# Altium PCB PCB1.PcbDoc
Units mm, origin at the board's own origin, x right, y up, seen from the top; angles counter-clockwise.
Board outline 152.4 x 101.6 mm, 2 copper layers (Top Layer, Bottom Layer); 37 components, 29 nets, 166 pads, 1 vias.
Unrouted connection lines stored in the file: 87.
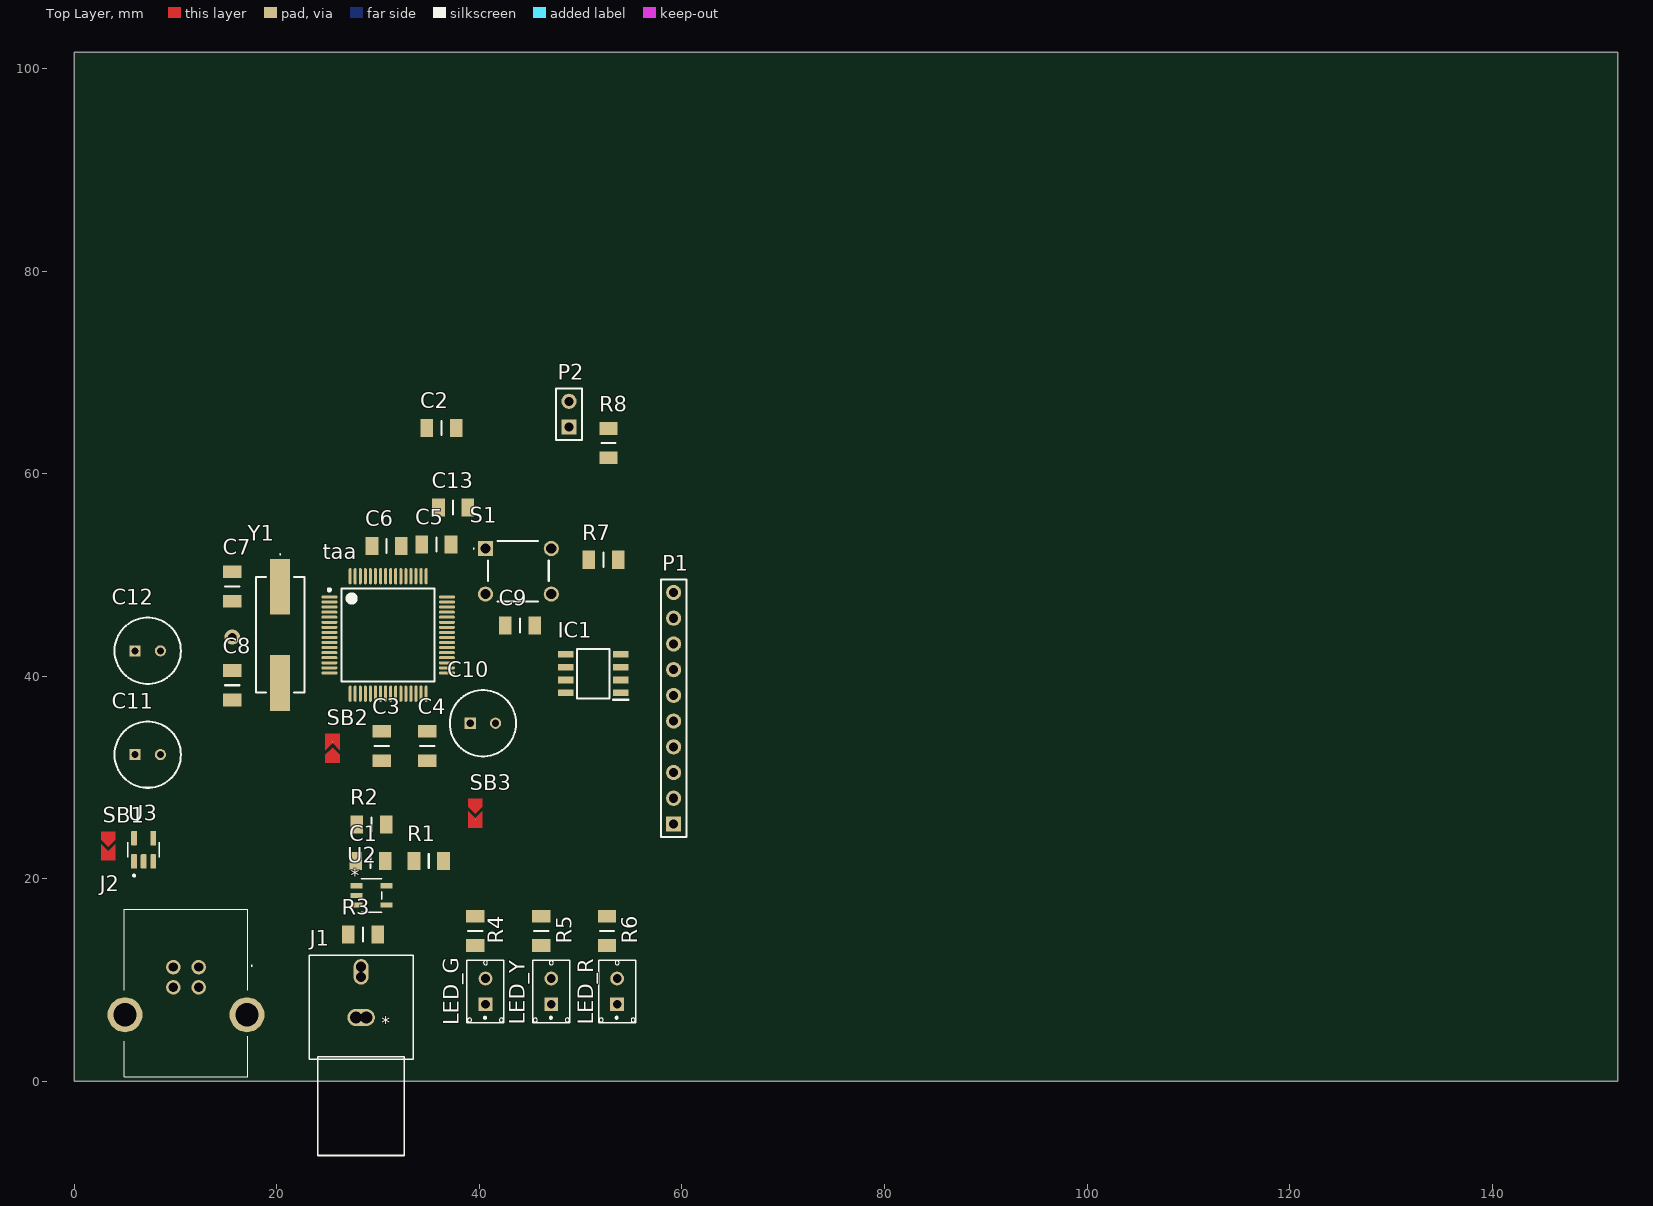
[diagram p0: Top Layer view]
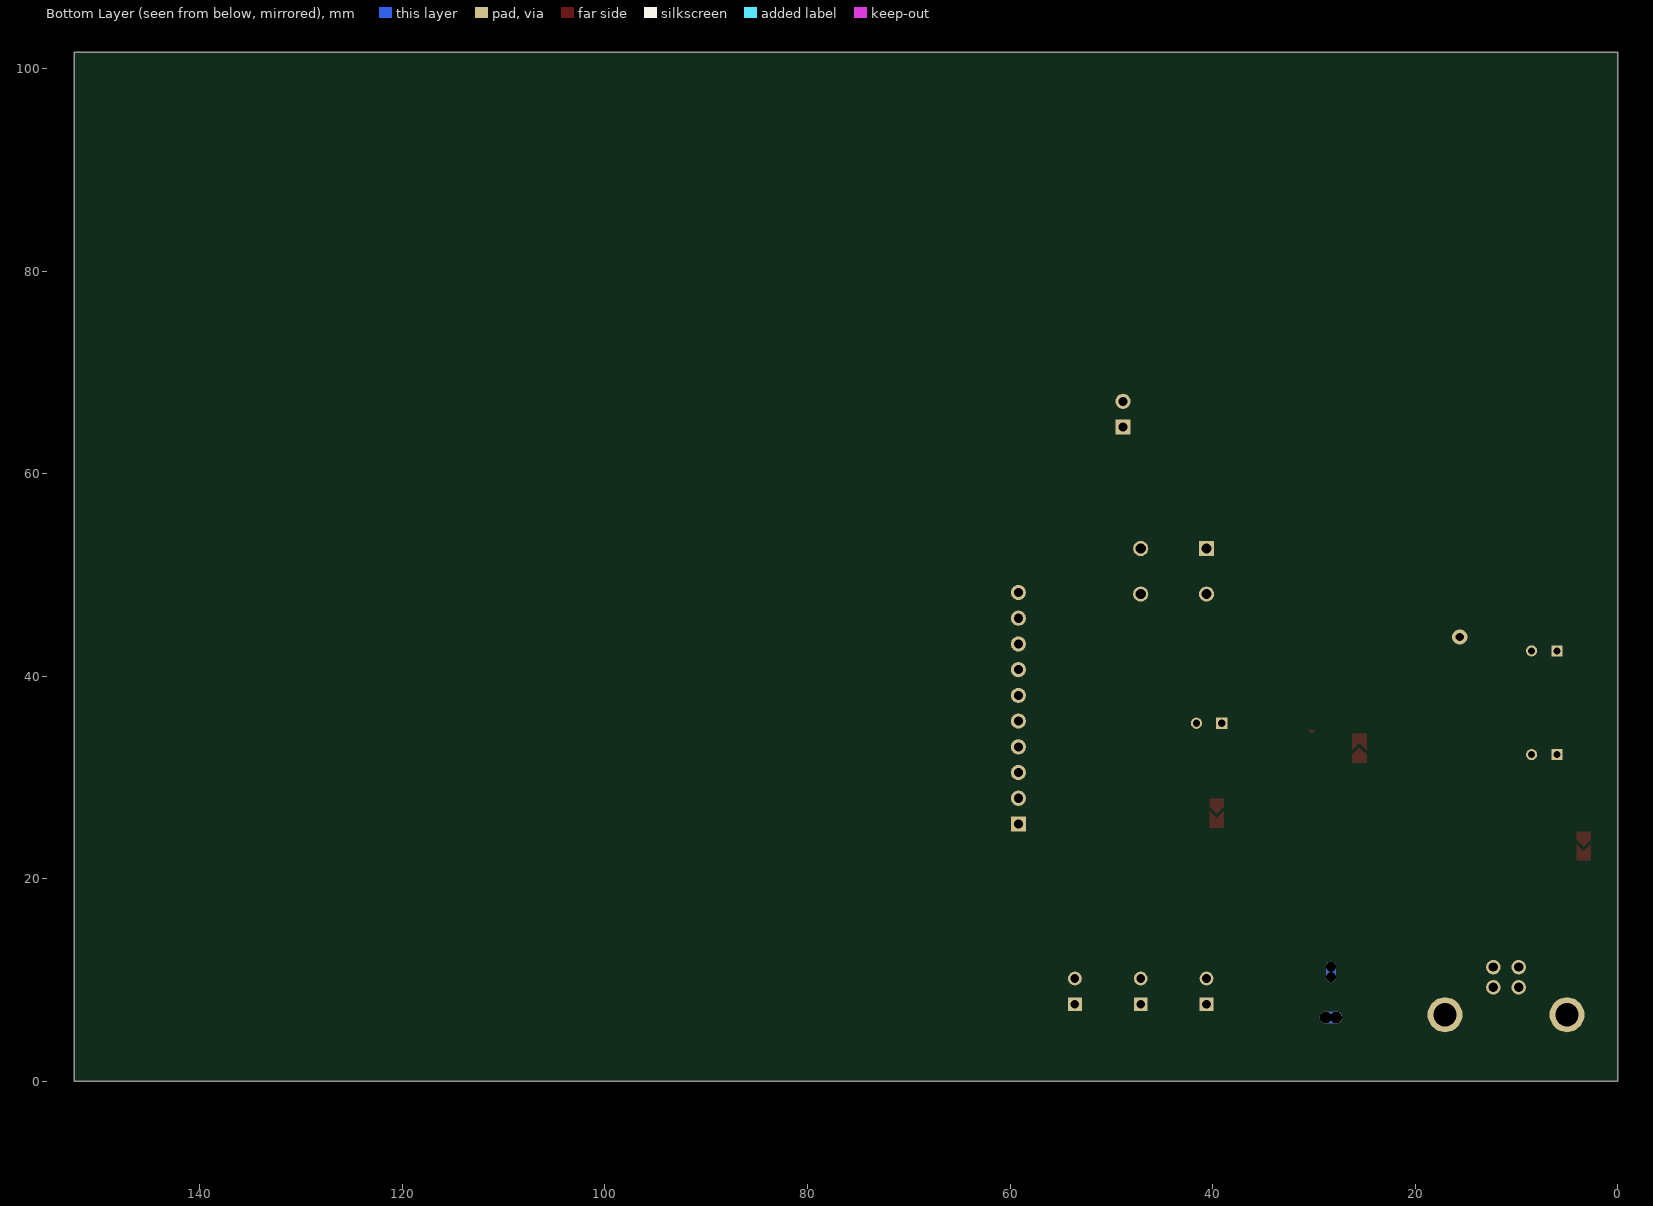
[diagram p1: Bottom Layer view, seen from below]

## Layer stack, top to bottom
Top Solder: solder mask 0.0102, Solder Resist, Dk 3.5
Top Layer: signal copper 0.0356
Dielectric 1: dielectric 0.32, FR-4, Dk 4.8
Bottom Layer: signal copper 0.0356
Bottom Solder: solder mask 0.0102, Solder Resist, Dk 3.5

## Board outline
0,0 152.4,0 152.4,101.6 0,101.6

## Design rules (kind name [scope] priority, off if disabled: settings)
BoardOutlineClearance [All] p1: gap=0.2 ignorepadtopadclearanceinfootprint=FALSE
Clearance [All] p1: gap=0.127 ignorepadtopadclearanceinfootprint=FALSE except(0.25: Arc-Hole Track-Hole SMDPad-Hole THPad-Hole Via-Hole Fill-Hole Poly-Hole Region-Hole Text-Hole)
ComponentClearance [All] p1: gap=0.127 collisioncheckmode=3 verticalgap=0.127 showdistances=TRUE
DiffPairsRouting [All] p1: maxlimit=0.254 minlimit=0.127 mostfreqgap=0.127 toplayer_minwidth=0.127 toplayer_maxwidth=25.4 toplayer_prefwidth=0.127 bottomlayer_minwidth=0.127 bottomlayer_maxwidth=25.4 bottomlayer_prefwidth=0.127 maxuncoupledlength=12.7
Height [All] p1: minheight=0 maxheight=1816.048 prefheight=12.7
HoleSize [All] p1: absolutevalues=TRUE maxlimit=6.3 minlimit=0.3 maxpercent=80.000 minpercent=20.000
HoleToHoleClearance [All] p1: gap=0.25 allowstackedmicrovias=FALSE
MinimumAnnularRing [All] p1: minimumring=0.076
MinimumSolderMaskSliver [All] p1: minsoldermaskwidth=0
PlaneClearance [All] p1: clearance=0.127
PlaneConnect PlaneConnectPowerPads [InPadClass('PowerPads')] p1: planeconnectstyle=Direct reliefexpansion=0.508 reliefentries=4 reliefconductorwidth=0.254 reliefairgap=0.254
PlaneConnect [All] p2: pad.planeconnectstyle=Relief pad.reliefexpansion=0.3 pad.reliefentries=4 pad.reliefconductorwidth=0.127 pad.reliefairgap=0.127 via.planeconnectstyle=Direct via.reliefexpansion=0.3 via.reliefentries=4 via.reliefconductorwidth=0.127 via.reliefairgap=0.127
PolygonConnect PolygonConnectPowerPads [All vs (InPadClass('PowerPads'))] p1: connectstyle=Direct reliefconductorwidth=0.254 reliefentries=4 polygonreliefangle="90 Angle" airgapwidth=0.254
PolygonConnect [All] p2: thpad.connectstyle=Relief thpad.reliefconductorwidth=0.127 thpad.reliefentries=4 thpad.polygonreliefangle="90 Angle" thpad.airgapwidth=0.127 smdpad.connectstyle=Relief smdpad.reliefconductorwidth=0.127 smdpad.reliefentries=4 smdpad.polygonreliefangle="90 Angle" smdpad.airgapwidth=0.127 via.connectstyle=Direct via.reliefconductorwidth=0.127 via.reliefentries=4 via.polygonreliefangle="90 Angle" via.airgapwidth=0.127
RoutingVias [All] p1: holewidth=0.3 width=0.6 viastyle="Through Hole" minholewidth=0.3 minwidth=0.6 maxholewidth=0.6 maxwidth=6.6
SilkToSilkClearance [All] p1: silktosilkclearance=0
SilkToSolderMaskClearance [IsPad] p1: minsilkscreentomaskgap=0.127 clearancetoexposedcopper=TRUE
SolderMaskExpansion [All] p1: expansion=0.075 istentingtop=FALSE
Width [All] p1: maxlimit=25.4 minlimit=0.127 preferedwidth=0.127 minimp=50.000000 maximp=50.000000 favimp=50.000000
20 further rules are at their usual default settings.

## Components (designator, comment, footprint, x,y, rotation, side; value= is the part's Value field where it differs from the comment)
C1 "Cap" RESC3216X70N 29.25,21.75 r0 top value="4.7 nF"
C2 "Cap" RESC3216X70N 36.25,64.5 r0 top value="100 nF"
C3 "Cap" RESC3216X70N 30.35,33.1 r90 top value="100 nF"
C4 "Cap" RESC3216X70N 34.85,33.1 r90 top value="100 nF"
C5 "Cap" RESC3216X70N 35.75,53 r0 top value="100 nF"
C6 "Cap" RESC3216X70N 30.85,52.85 r0 top value="100 nF"
C7 "Cap" RESC3216X70N 15.6,48.85 r270 top value="18 pF"
C8 "Cap" RESC3216X70N 15.6,39.1 r90 top value="18 pF"
C9 "Cap" RESC3216X70N 44,45 r180 top value="100 nF"
C10 "Cap" CAPPRD250W50D655H1250 39.1,35.35 r0 top value="4.7 uF"
C11 "Cap" CAPPRD250W50D655H1250 6,32.25 r0 top value=1uF
C12 "Cap" CAPPRD250W50D655H1250 6,42.5 r0 top value=1uF
C13 "Cap" RESC3216X70N 37.405,56.642 r0 top value="100 nF"
IC1 "NLSX4373DR2G" SOIC127P600X175-8N 51.25,40.25 r180 top
J1 "RCA" KLPX-0848A-2-B_KYC 28.321,6.295 r180 top
J2 "USB B Fem" UJ2BH1TH 11.029,0.461 r0 top
LED_G "fucking led maat hoe moeilijk ist kutprogram" LED_SSL-LX4673GD-LA20 40.6,8.87 r90 top
LED_R "fucking led maat hoe moeilijk ist kutprogram" LED_SSL-LX4673GD-LA20 53.6,8.87 r90 top
LED_Y "fucking led maat hoe moeilijk ist kutprogram" LED_SSL-LX4673GD-LA20 47.1,8.87 r90 top
P1 "Header 10" HDR1X10 59.182,25.4 r90 top
P2 "HDR_CLR_BTN" HDR1X2 48.848,64.597 r90 top
R1 "Res1" RESC3216X70N 35,21.75 r0 top value=100K
R2 "Res1" RESC3216X70N 29.35,25.35 r0 top value=220
R3 "Res1" RESC3216X70N 28.5,14.5 r0 top value=75
R4 "Res1" RESC3216X70N 39.6,14.85 r90 top value=150
R5 "Res1" RESC3216X70N 46.1,14.85 r90 top value=150
R6 "Res1" RESC3216X70N 52.6,14.85 r90 top value=150
R7 "Res1" RESC3216X70N 52.25,51.5 r0 top value=4k7
R8 "Res1" RESC3216X70N 52.75,63 r90 top value=4k7
S1 "Doubl-Pole, Single-Throw Button" TS026655BK160LCRD 40.6,52.6 r0 top
SB1 "Solder Bridge" "Solder Bridge" 5.35,19.85 r270 top
SB2 "Solder Bridge" "Solder Bridge" 23.5,36.25 r90 top
SB3 "Solder Bridge" "Solder Bridge" 41.6,23.1 r270 top
taa "STM32F446RCT6" STM-LQFP64_L 30.988,44.069 r0 top
U2 "Inverter1" DBV5-M 29.35,18.35 r0 top
U3 "NCP115ASN330T2G" SOT95P275X120-5N 6.85,22.85 r90 top
Y1 "XTAL" ECS80185PXGMTR 20.32,44.069 r270 top

## Footprints (in the part's own frame and the unit in brackets; to place one, negate y for a bottom-side part, rotate by r counter-clockwise, add the part's x,y. Pads: shape width x height; smd on the part's side, far side on the other; paste and mask are expansions set on the pad)
CAPPRD250W50D655H1250 [mm]
  rect 1.1x1.1 hole 0.7: 1(0,0)
  round 1.1 hole 0.7: 2(2.5,0)
  silkscreen extent -2.02,-3.27 4.52,3.27, body extent -2.14,-3.4 4.65,3.4, height 12.5
DBV5-M [mil]
  rect 46.5x20 smd paste+0 mask+0: 1(-57.75,37.4) 2(-57.75,0) 3(-57.75,-37.4) 4(57.75,-37.4) 5(57.75,37.4)
  silkscreen extent -40,-65 40,65, body extent -59,-60 59,60, height 57
ECS80185PXGMTR [mm]
  rect 5.5x2 smd: 1(-4.75,0) 2(4.75,0)
  silkscreen extent -8,-2.4 5.7,2.4, body extent -7.3,-2.4 7.3,2.4, height 4.4
HDR1X2 [mm] "Connector; Header; 2 Position"
  rect 1.5x1.5 hole 0.9: 1(0,0)
  round 1.5 hole 0.9: 2(2.54,0)
  silkscreen extent -1.27,-1.27 3.81,1.27
HDR1X10 [mm] "Connector; Header; 10 Position"
  rect 1.5x1.5 hole 0.9: 1(0,0)
  round 1.5 hole 0.9: 2(2.54,0) 3(5.08,0) 4(7.62,0) 5(10.16,0) 6(12.7,0) 7(15.24,0) 8(17.78,0) 9(20.32,0) 10(22.86,0)
  silkscreen extent -1.27,-1.27 24.13,1.27
KLPX-0848A-2-B_KYC [mil]
  oval 107x67 smd paste+0 mask+0: 1(0,0)
  oval 59x99 smd paste+0 mask+0: 2(0,-177.17)
  round 47 / inner round 60 / far side round 47 hole 47 unplated paste-23.5 mask-23.5: S_1_H1(20,0) S_1_H2(-20,0)
  round 39 / inner round 60 / far side round 39 hole 39 unplated paste-19.5 mask-19.5: S_2_H1(0,-157.17) S_2_H2(0,-197.17)
  Multi-Layer lines w39: 0,-157.17 0,-197.17
  Multi-Layer lines w47: 20,0 -20,0
  silkscreen extent -202,-242 202,536
LED_SSL-LX4673GD-LA20 [mm]
  rect 1.358x1.358 / inner round 1.358 / far side rect 1.358x1.358 hole 0.85: 1(-1.27,0)
  round 1.358 hole 0.85: 2(1.27,0)
  silkscreen extent -3.08,-1.83 3.08,1.83
RESC3216X70N [mm]
  rect 1.25x1.8 smd: 1(-1.45,0) 2(1.45,0)
  silkscreen extent 0,-0.7 0,0.7, body extent -1.6,-0.8 1.6,0.8, height 0.55
SOIC127P600X175-8N [mm]
  rect 1.525x0.65 smd: 1(-2.712,1.905) 2(-2.712,0.635) 3(-2.712,-0.635) 4(-2.712,-1.905) 5(2.712,-1.905) 6(2.712,-0.635) 7(2.712,0.635) 8(2.712,1.905)
  silkscreen extent -3.47,-2.45 1.6,2.58, body extent -3,-2.45 3,2.45, height 1.75
"Solder Bridge" [mm]
  round 0.025 smd mask+0.102: 1(-4,-2) 2(-2.75,-2)
  Top Layer region: -4.8,-2.7 -4.8,-1.3 -4,-1.3 -3.3,-2 -4,-2.7
  Top Layer region: -3.55,-2.7 -1.95,-2.7 -1.95,-1.3 -3.55,-1.3 -2.85,-2
SOT95P275X120-5N [mm]
  rrect25% 1.42x0.58 smd: 1(-1.145,0.95) 2(-1.145,0) 3(-1.145,-0.95) 4(1.145,-0.95) 5(1.145,0.95)
  silkscreen extent -2.64,-1.56 0.75,1.56, body extent -1.34,-1.5 1.41,1.5, height 1.1
STM-LQFP64_L [mm] "QFP, 64-Leads, Body 10x10mm, Pitch 0.5mm, IPC High Density"
  oval 1.6x0.3 smd: 1(-5.8,3.75) 2(-5.8,3.25) 3(-5.8,2.75) 4(-5.8,2.25) 5(-5.8,1.75) 6(-5.8,1.25) 7(-5.8,0.75) 8(-5.8,0.25) 9(-5.8,-0.25) 10(-5.8,-0.75) 11(-5.8,-1.25) 12(-5.8,-1.75) 13(-5.8,-2.25) 14(-5.8,-2.75) 15(-5.8,-3.25) 16(-5.8,-3.75) 33(5.8,-3.75) 34(5.8,-3.25) 35(5.8,-2.75) 36(5.8,-2.25) 37(5.8,-1.75) 38(5.8,-1.25) 39(5.8,-0.75) 40(5.8,-0.25) 41(5.8,0.25) 42(5.8,0.75) 43(5.8,1.25) 44(5.8,1.75) 45(5.8,2.25) 46(5.8,2.75) 47(5.8,3.25) 48(5.8,3.75)
  oval 0.3x1.6 smd: 17(-3.75,-5.8) 18(-3.25,-5.8) 19(-2.75,-5.8) 20(-2.25,-5.8) 21(-1.75,-5.8) 22(-1.25,-5.8) 23(-0.75,-5.8) 24(-0.25,-5.8) 25(0.25,-5.8) 26(0.75,-5.8) 27(1.25,-5.8) 28(1.75,-5.8) 29(2.25,-5.8) 30(2.75,-5.8) 31(3.25,-5.8) 32(3.75,-5.8) 49(3.75,5.8) 50(3.25,5.8) 51(2.75,5.8) 52(2.25,5.8) 53(1.75,5.8) 54(1.25,5.8) 55(0.75,5.8) 56(0.25,5.8) 57(-0.25,5.8) 58(-0.75,5.8) 59(-1.25,5.8) 60(-1.75,5.8) 61(-2.25,5.8) 62(-2.75,5.8) 63(-3.25,5.8) 64(-3.75,5.8)
  silkscreen extent -5.92,-4.6 4.6,4.6, body extent -5,-5 5,5, height 1.6
TS026655BK160LCRD [mm]
  rect 1.5x1.5 hole 1: 1(0,0)
  round 1.5 hole 1: 2(6.5,0) 3(0,-4.5) 4(6.5,-4.5)
  silkscreen extent -1.2,-5.25 6.25,0.75, body extent -0.4,-5.25 6.9,0.75, height 5.8
UJ2BH1TH [mm]
  round 1.431 hole 0.92: 1(1.25,10.81) 2(-1.25,10.81) 3(-1.25,8.81) 4(1.25,8.81)
  round 3.45 hole 2.3: MH1(-6.02,6.1) MH2(6.02,6.1)
  silkscreen extent -6.1,0 6.55,16.5, body extent -7.5,-4.05 7.5,12.4, height 11.03

## Part data
C1 C2 C3 C4 C5 C6 C7 C8 C9 C10 C11 C12 C13: "Capacitor", LatestRevisionDate=17-Jul-2002, LatestRevisionNote="Re-released for DXP Platform.", PackageDescription="Radial Cap, Thru-Hole; 2 Leads; 0.3 in Pin Spacing", PackageReference=RAD-0.3, Published=8-Jun-2000, Publisher="Altium Limited"
IC1: "Integrated Circuit", Manufacturer_Name=onsemi, Mouser Part Number=863-NLSX4373DR2G, Arrow Part Number=NLSX4373DR2G, Arrow Price/Stock=https://www.arrow.com/en/products/nlsx4373dr2g/on-semiconductor?region=nac, Datasheet Link=http://www.onsemi.com/pub/Collateral/NLSX4373-D.PDF, Height=1.75mm, Manufacturer_Part_Number=NLSX4373DR2G, Mouser Price/Stock=https://www.mouser.co.uk/ProductDetail/onsemi/NLSX4373DR2G?qs=zXUFZjqEZiiEfIwrZ45LUw%3D%3D
J1: library part KLPX-0848A-2-B, "No Description Available", Mfr_Name="KYCON, INC.", Copyright="Copyright (C) 2023 Ultra Librarian. All rights reserved.", Manufacturer_Part_Number=KLPX-0848A-2-B, RefDes=RefDes, Type=DEV
P1: "Header, 10-Pin", LatestRevisionDate=17-Jul-2002, LatestRevisionNote="Re-released for DXP Platform.", Publisher="Altium Limited"
P2: library part "Header 2", "Header, 2-Pin", LatestRevisionDate=17-Jul-2002, LatestRevisionNote="Re-released for DXP Platform.", Publisher="Altium Limited"
R1 R2 R3 R4 R5 R6 R7 R8: "Resistor", LatestRevisionDate=17-Jul-2002, LatestRevisionNote="Re-released for DXP Platform.", PackageDescription="Axial Device, Thru-Hole; 2 Leads; 0.3 in Pin Spacing", PackageReference=AXIAL-0.3, Published=8-Jun-2000, Publisher="Altium Limited"
S1: library part "DPST Push Button", closed=0, Rclosed=1m, Ropen=1Meg, SimulationGenericComponent=True
taa: library part CMP-0243-00216-1, "ARM Cortex-M4 32-bit MCU+FPU, 256 KB Flash, 128 KB Internal RAM, 50 I/Os, 64-Pin LQFP, -40 to 85 degC, Tray", I/Os (High Current)=50, Operating Frequency(F) (Processor speed) (MHz)=180, Package Description=LQFP64, Package Reference="64-Pin Low-profile Quad Flat Package, Body 10 x 10 mm, Pitch 0.5 mm", Supply Voltage(Vcc) min (V)=1.7, ComponentLink1Description="Manufacturer URL", ComponentLink1URL=http://www.st.com/, ComponentLink2Description=Datasheet, ComponentLink2URL=http://www.st.com/st-web-ui/static/active/en/resource/technical/document/datasheet/DM00141306.pdf, Core="ARM Cortex-M4", D/A Converter=2, DatasheetVersion="Rev. 6", FLASH Size (Prog) (kB)=256, Internal RAM Size (kB)=128, Mounting Technology="Surface Mount", Packing=Tray
U2: Supplier Part Number 1=296-8487-1-ND, Supplier 1=Digi-Key
U3: "No Description Available", Mfr_Name=onsemi, Copyright="Copyright (C) 2023 Ultra Librarian. All rights reserved.", Manufacturer_Part_Number=NCP115ASN330T2G, RefDes=RefDes, Type=DEV
Y1: library part ECS-80-18-5PX-GM-TR, "Crystal or Oscillator", Manufacturer_Name=ECS, Mouser Part Number=520-80-18-5PX-GM-TR, Datasheet Link=https://ecsxtal.com/store/pdf/csm-7x.pdf, Height=4.3mm, Manufacturer_Part_Number=ECS-80-18-5PX-GM-TR, Mouser Price/Stock=https://www.mouser.co.uk/ProductDetail/ECS/ECS-80-18-5PX-GM-TR?qs=amGC7iS6iy9i4EiBY7c3iQ%3D%3D

## Via types
v1: diameter 1.5, hole 0.8, Top Layer to Bottom Layer, 1 vias

## Nets (pads, with @x,y where several pads share a name; then routed paths per layer and width w, separated by ;. In a path a pad name is that pad's centre, name@x,y a point inside that pad or via, vN(x,y) a via of type N, cw(c..) or ccw(c..) an arc to the next point about the centre after c; other vN are vias at no path point)
+5: C11.2 J2.1 P1.8 SB3.2 U3.1 U3.3
CLR_BTN: C13.2 P2.1 R8.2 taa.8
GND: C2.1 C3.1 C4.1 C5.1 C6.1 C7.2 C8.2 C9.1 C10.2 C11.1 C12.1 C13.1 IC1.4 J1.1 J2.4 P1.2 P1.7 P2.2 R3.1 S1.4 taa.12 taa.18 taa.31 taa.47 taa.60 taa.63 U2.3 U3.2
I2C3_SCL: IC1.3 taa.41
I2C3_SCL_5V: IC1.6 P1.10
I2C3_SDA: IC1.2 taa.40
I2C3_SDA_5V: IC1.7 P1.9
NetC1_1: C1.1 J1.2 R3.2
NetC1_2: C1.2 R2.2
NetC2_2: C2.2 C3.2 C4.2 C5.2 C6.2 SB2.2 taa.13 taa.19 taa.32 taa.48 taa.64 | length 1
  Top Layer w0.25: SB2.2 25.5,34.184 ; C3.2@30.075,34.55 C3.2
NetC7_1: C7.1 taa.5 Y1.1
NetC8_1: C8.1 taa.6 Y1.2
NetC10_1: C10.1 taa.30
NetIC1_8: IC1.8 SB3.1
NetLED_G_2: LED_G.2 R4.1
NetLED_R_2: LED_R.2 R6.1
NetLED_Y_2: LED_Y.2 R5.1
NetR1_2: R1.2 R2.1 U2.2
NetR4_2: R4.2 taa.34
NetR5_2: R5.2 taa.35
NetR6_2: R6.2 taa.36
NetSB1_1: SB1.1 U3.5
PA0: P1.5 taa.14
PA1: P1.6 taa.15
RST_BTN: C9.2 R7.2 S1.3 taa.7
SPDIFRX_IN2: R1.1 taa.24 U2.4
TCK: P1.3 taa.49
TMS: P1.4 taa.46
VCC: C12.2 IC1.1 IC1.5 LED_G.1 LED_R.1 LED_Y.1 P1.1 R7.1 R8.1 SB1.2 SB2.1 U2.5
pads on no net: J1.S_1_H1 J1.S_1_H2 J1.S_2_H1 J1.S_2_H2 J2.2 J2.3 J2.MH1 J2.MH2 S1.1 S1.2 taa.1 taa.2 taa.3 taa.4 taa.9 taa.10 taa.11 taa.16 taa.17 taa.20 taa.21 taa.22 taa.23 taa.25 taa.26 taa.27 taa.28 taa.29 taa.33 taa.37 taa.38 taa.39 taa.42 taa.43 taa.44 taa.45 taa.50 taa.51 taa.52 taa.53 taa.54 taa.55 taa.56 taa.57 taa.58 taa.59 taa.61 taa.62 U2.1 U3.4
copper on no net:
  other v1: 15.6,43.85

## Text inside footprints (layer, text, board x,y; h text height)
J1: Top Overlay "*" at 31.178,6.93 h1.27 r180; Mechanical 13 "*" at 31.178,6.93 h1.27 r180
U2: Top Overlay "*" at 27.312,19.681 h1.27; Mechanical 13 "*" at 28.41,18.716 h1.27